# Altium PCB LEDBoard.PcbDoc
Units mm, origin at the board's own origin, x right, y up, seen from the top; angles counter-clockwise.
Board outline 21 x 160 mm, 2 copper layers (Top Layer, Bottom Layer), stack 0.57 mm thick; 16 components, 19 nets, 73 pads, 30 vias.
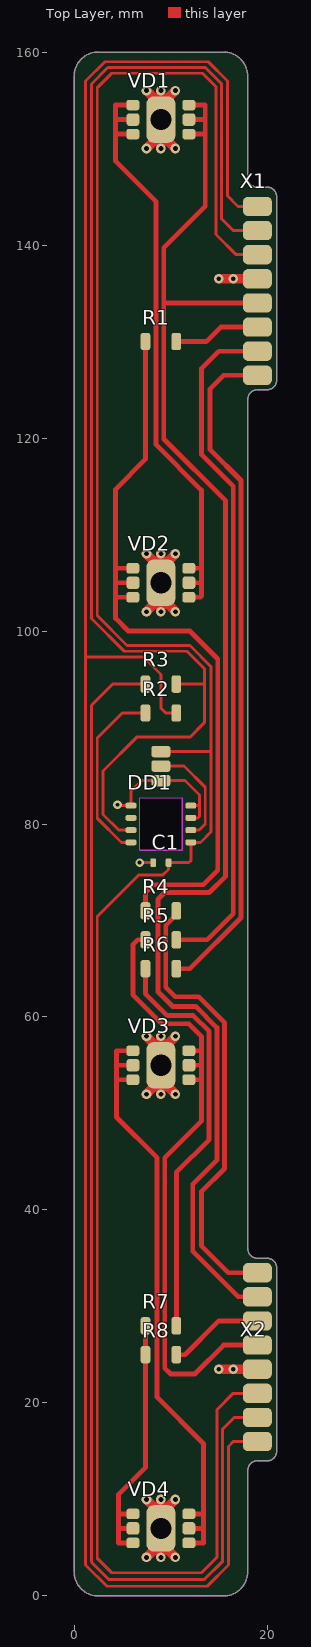
[diagram p0: Top Layer view]
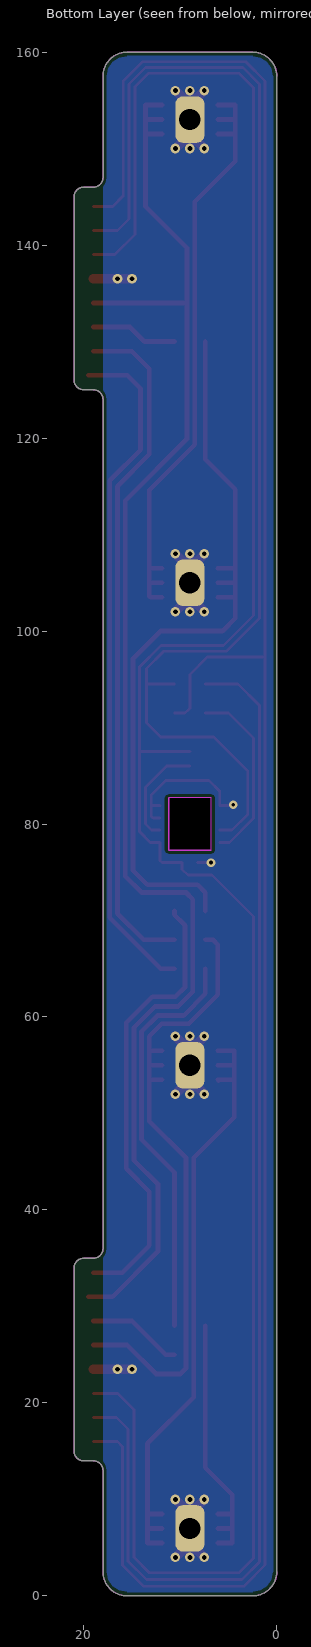
[diagram p1: Bottom Layer view, seen from below]
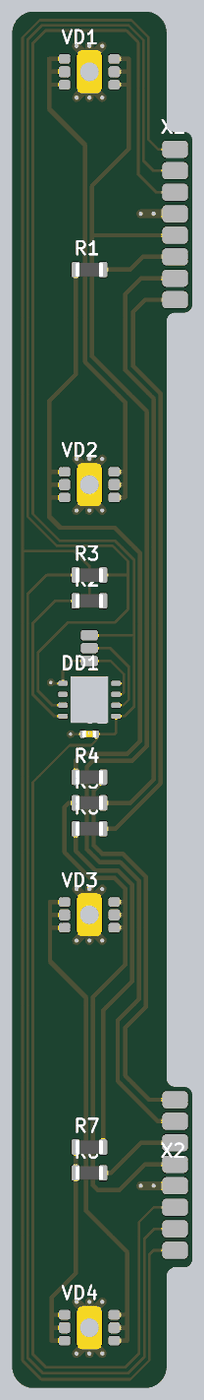
[diagram p2: 3D render of the assembled board from above, using the file's embedded part models]

## Layer stack, top to bottom
Top Solder: solder mask 0.0102, Solder Resist, Dk 3.5
Top Layer: signal copper 0.035
Dielectric 1: core 0.5, FR-4, Dk 4.2
Bottom Layer: signal copper 0.035

## Board outline
2.5,0 15.5,0 ccw(c15.5,2.5) 18,2.5 18,13 cw(c19,13) 19,14 20,14 ccw(c20,15) 21,15 21,34 ccw(c20,34) 20,35 19,35 cw(c19,36) 18,36 18,124 cw(c19,124) 19,125 20,125 ccw(c20,126) 21,126 21,145 ccw(c20,145) 20,146 19,146 cw(c19,147) 18,147 18,157.5 ccw(c15.5,157.5) 15.5,160 2.5,160 ccw(c2.5,157.5) 0,157.5 0,2.5 ccw(c2.5,2.5)

## Design rules (kind name [scope] priority, off if disabled: settings)
Clearance Clearance_Mid2_to_edge [OnLayer('Mid-Layer 2') vs OnLayer('Keep-Out Layer')] p1: gap=0.5
Clearance Clearance_Mid1_to_edge [OnLayer('Mid-Layer 1') vs OnLayer('Keep-Out Layer')] p2: gap=0.5
Clearance Clearance_Top_to_edge [OnLayer('Top Layer') vs OnLayer('Keep-Out Layer')] p3: gap=0.3
Clearance Clearance_Bottom_to_edge [OnLayer('Bottom Layer') vs OnLayer('Keep-Out Layer')] p4: gap=0.3
Clearance ClearancePoly [InPolygon] p5: gap=0.3
Clearance [All] p6: gap=0.3
FabricationTestPointUsage TestPointUsage [All] p1: valid=0 allowmultiple=FALSE
FabricationTestpoint Testpoint [All] p1: side=3 testpointundercomponent=TRUE minsize=1.016 maxsize=2.54 preferedsize=1.524 minholesize=0 maxholesize=1.016 preferedholesize=0.813 testpointgrid=0.025 allowsidetop=TRUE allowsidebottom=TRUE usegrid=TRUE gridtolerance=0
PolygonConnect [All] p1: connectstyle=Direct reliefconductorwidth=0.25 reliefentries=4 polygonreliefangle="45 Angle" airgapwidth=0.4
RoutingVias [All] p1: holewidth=0.4 width=0.9 viastyle="Through Hole" minholewidth=0.4 minwidth=0.9 maxholewidth=1 maxwidth=2
SilkToSolderMaskClearance SilkscreenOverComponentPads [IsPad] p1: minsilkscreentomaskgap=0.254 clearancetoexposedcopper=TRUE
SolderMaskExpansion [All] p1: expansion=0.102
Width [All] p1: maxlimit=3 minlimit=0.3 preferedwidth=0.5 minimp=50.000000 maximp=50.000000 favimp=50.000000
26 further rules are at their usual default settings.

## Components (designator, comment, footprint, x,y, rotation, side; value= is the part's Value field where it differs from the comment)
C1 "CC0603KRX7R7BB104" CAPACITORSMD0603(MANUAL) 9,76 r0 top
DD1 "LM75A" SO8_FLIPPED 9,80 r180 top
R1 "RC1206JR-070R" RESISTORSMD1206(MANUAL) 9,130 r0 top
R2 "RC1206JR-070R" RESISTORSMD1206(MANUAL) 9,91.5 r0 top (schematic designator R11)
R3 "RC1206JR-070R" RESISTORSMD1206(MANUAL) 9,94.5 r180 top (schematic designator R10)
R4 "RC1206JR-070R" RESISTORSMD1206(MANUAL) 9,71 r0 top (schematic designator R5)
R5 "RC1206JR-070R" RESISTORSMD1206(MANUAL) 9,68 r0 top (schematic designator R6)
R6 "RC1206JR-070R" RESISTORSMD1206(MANUAL) 9,65 r0 top (schematic designator R8)
R7 "RC1206JR-070R" RESISTORSMD1206(MANUAL) 9,28 r0 top
R8 "RC1206JR-070R" RESISTORSMD1206(MANUAL) 9,25 r0 top (schematic designator R4)
VD1 "OLP-5065F6L-06A" OLP-5065F6L-06A(MANUALVAR2) 9,153 r0 top
VD2 "OLP-5065F6L-06A" OLP-5065F6L-06A(MANUALVAR2) 9,105 r0 top
VD3 "OLP-5065F6L-06A" OLP-5065F6L-06A(MANUALVAR2) 9,55 r0 top
VD4 "OLP-5065F6L-06A" OLP-5065F6L-06A(MANUALVAR2) 9,7 r0 top
X1 "ConnectorLEDSide" CONNECTORLEDSIDE 19,144 r0 top
X2 "ConnectorLEDSide" CONNECTORLEDSIDE 19,16 r180 top

## Footprints (in the part's own frame and the unit in brackets; to place one, negate y for a bottom-side part, rotate by r counter-clockwise, add the part's x,y. Pads: shape width x height; smd on the part's side, far side on the other; paste and mask are expansions set on the pad)
CAPACITORSMD0603(MANUAL) [mm]
  rrect50% 0.6x0.9 smd: 1(-0.8,0) 2(0.8,0)
  body extent -0.8,-0.4 0.8,0.4, height 0.3
CONNECTORLEDSIDE [mm]
  rrect50% 3x2 smd: 1(0,0) 2(0,-2.5) 3(0,-5) 4(0,-7.5) 5(0,-10) 6(0,-12.5) 7(0,-15) 8(0,-17.5)
OLP-5065F6L-06A(MANUALVAR2) [mm]
  rrect50% 1.35x1.1 smd: 1(-2.9,-1.5) 1(-2.9,1.5) 2(2.9,-1.5) 2(2.9,1.5)
  rrect50% 1.35x1.3 smd: 1(-2.9,0) 2(2.9,0)
  rrect50% 3x4.8 hole 2.2: 3(0,0)
  body extent -3.2,-2.5 3.2,2.5, height 1.3
RESISTORSMD1206(MANUAL) [mm]
  rrect50% 1x1.8 smd: 1(-1.6,0) 2(1.6,0)
  body extent -1.6,-0.8 1.6,0.8, height 0.6
SO8_FLIPPED [mm]
  rrect50% 1.1x0.6 smd: 1(3.1,1.905) 2(3.1,0.635) 3(3.1,-0.635) 4(3.1,-1.905) 5(-3.1,-1.905) 6(-3.1,-0.635) 7(-3.1,0.635) 8(-3.1,1.905)
  Keep-Out Layer board cut-out: -2.2,2.7 2.2,2.7 2.2,-2.7 -2.2,-2.7
  Keep-Out Layer lines w0.1: 2.2,2.7 2.2,-2.7 -2.2,-2.7 -2.2,2.7 2.2,2.7
  body extent -2,-2.5 2,2.5, height 1.1

## Part data
C1: library part CapacitorSMD0603(reflow), "CAPACITOR Capacitor SMD 0603 1.6x0.8mm"
DD1: "IC Temperature sensor"
R1 R2 R3 R4 R5 R6 R7 R8: library part ResistorSMD1206, "RESISTOR Resistor SMD 1210 3.1x1.6mm"
VD1 VD2 VD3 VD4: "White LED 1.0W 155lm 3.0V 350mA"

## Free pads (board coordinates)
  rrect50% 2x1.2 smd: 0(9,84.5) 0(9,86) 0(9,87.5)

## Via types
v1: diameter 1, hole 0.5, Top Layer to Bottom Layer, tented top, 24 vias
v2: diameter 1, hole 0.5, Top Layer to Bottom Layer, tented both sides, 4 vias
v3: diameter 0.9, hole 0.4, Top Layer to Bottom Layer, tented both sides, 2 vias

## Nets (pads, with @x,y where several pads share a name; then routed paths per layer and width w, separated by ;. In a path a pad name is that pad's centre, name@x,y a point inside that pad or via, vN(x,y) a via of type N, cw(c..) or ccw(c..) an arc to the next point about the centre after c; other vN are vias at no path point)
A0: DD1.7 pad.0@9,86 | length 11.1
  Top Layer w0.3: pad.0@9,86 11.4,86 13.6,83.8 13.6,80 12.965,79.365 DD1.7
GND: C1.1 DD1.4 DD1.5 DD1.6 pad.0@9,84.5 VD1.3 VD2.3 VD3.3 VD4.3 X1.4 X2.4 | length 82.5
  Top Layer w0.3: v3(4.5,82) 4.595,81.905 DD1.4 5.9,83.4 7,84.5 9,84.5 11.5,84.5 13,83 13,81.9 ; v3(6.8,76) C1.1 ; DD1.6 12.835,80.635 13,80.8 13,81.9 ; DD1.5 12.105,81.9 13,81.9
  Top Layer w1: v1(7.5,4) VD4.3@9,5.5 ; v1(7.5,10) VD4.3@9,8.5 ; v1(7.5,52) VD3.3@9,53.5 ; v1(7.5,58) VD3.3@9,56.5 ; v1(7.5,102) VD2.3@9,103.5 ; v1(7.5,108) VD2.3@9,106.5 ; v1(7.5,150) VD1.3@9,151.5 ; v1(7.5,156) VD1.3@9,154.5 ; v1(9,4) VD4.3@9,5.5 ; v1(9,10) VD4.3@9,8.5 ; v1(9,52) VD3.3@9,53.5 ; v1(9,58) VD3.3@9,56.5 ; v1(9,102) VD2.3@9,103.5 ; v1(9,108) VD2.3@9,106.5 ; v1(9,150) VD1.3@9,151.5 ; v1(9,156) VD1.3@9,154.5 ; v1(10.5,4) VD4.3@9,5.5 ; v1(10.5,10) VD4.3@9,8.5 ; v1(10.5,52) VD3.3@9,53.5 ; v1(10.5,58) VD3.3@9,56.5 ; v1(10.5,102) VD2.3@9,103.5 ; v1(10.5,108) VD2.3@9,106.5 ; v1(10.5,150) VD1.3@9,151.5 ; v1(10.5,156) VD1.3@9,154.5 ; v2(15,23.5) v2(16.5,23.5) X2.4 ; v2(15,136.5) v2(16.5,136.5) X1.4 ; VD4.3@9,5.5 VD4.3 VD4.3@9,8.5 ; VD3.3@9,53.5 VD3.3 VD3.3@9,56.5 ; VD2.3@9,103.5 VD2.3 VD2.3@9,106.5 ; VD1.3@9,151.5 VD1.3 VD1.3@9,154.5
NetR6_1: R6.1 R7.2 | length 42.7
  Top Layer w0.5: R6.1 7.4,62.4 9.65,60.15 12.35,60.15 14,58.5 14,47.3 10.6,43.9 R7.2
SCL: DD1.2 R3.1 X1.2 | length 131.5
  Top Layer w0.3: DD1.2 4.635,79.365 3,81 3,85.5 6.5,89 12,89 13.5,90.5 13.5,94.5 ; R3.1 13.5,94.5 ; X1.2 16.5,141.5 15.3,142.7 15.3,156.7 13.6,158.4 3.5,158.4 1.8,156.7 1.8,101.3 5.2,97.9 11.7,97.9 13.5,96.1 13.5,94.5
SCL1: R3.2 X2.2 | length 128.2
  Top Layer w0.3: R3.2 4,94.5 1.8,92.3 1.8,3.5 3.6,1.7 13.5,1.7 15.4,3.6 15.4,17.3 16.6,18.5 X2.2
SDA: R2.2 X1.1 X2.1 | length 231.6
  Top Layer w0.3: 1.2,97.3 7.2,97.3 9,95.5 9,92 9.5,91.5 R2.2 ; X2.1 16.5,16 16,15.5 16,3.2 13.8,1 3.4,1 1.2,3.2 1.2,157 3.2,159 13.9,159 15.9,157 15.9,145.1 17,144 X1.1
SDA1: DD1.1 R2.1 | length 18.9
  Top Layer w0.3: DD1.1 4.905,78.095 2.4,80.6 2.4,88.9 5,91.5 R2.1
STR1: VD1.1 VD2.2 | length 63.8
  Top Layer w0.5: VD1.1@6.1,151.5 4.3,151.5 ; VD1.1@6.1,153 4.3,153 ; VD1.1@6.1,154.5 4.3,154.5 4.3,153 ; VD2.2@11.9,103.5 13.1,103.5 13.2,103.6 13.2,105 ; VD2.2@11.9,105 13.2,105 ; VD2.2@11.9,106.5 13.1,106.5 ; 4.3,151.5 4.3,153 ; 4.3,151.5 4.3,148.7 8.5,144.5 8.5,119.3 13.2,114.6 13.2,105
STR1+: VD1.2 X1.5 X2.7 | length 157.7
  Top Layer w0.5: VD1.2@11.9,151.5 13.6,151.5 ; VD1.2@11.9,153 13.6,153 ; VD1.2@11.9,154.5 13.6,154.5 13.6,153 ; X1.5 9.3,134 ; X2.7@19.5,31 17,31 12.3,35.7 12.3,42.675 14.8,45.175 14.8,58.9 12.6,61.1 10.2,61.1 8.7,62.6 8.7,72.2 9.4,72.9 14,72.9 15.7,74.6 15.7,113.5 9.3,119.9 9.3,134 ; 9.3,134 9.3,139.7 13.6,144 13.6,151.5 ; 13.6,151.5 13.6,153
STR1-: R1.1 R4.1 VD2.1 | length 79.9
  Top Layer w0.5: 4.4,103.5 VD2.1@6.1,103.5 ; VD2.1@6.1,105 4.3,105 ; VD2.1@6.1,106.5 4.3,106.5 ; R4.1 7.4,72.9 8.2,73.7 13.4,73.7 14.9,75.2 14.9,97.1 12,100 5.6,100 4.3,101.3 4.3,105 ; R1.1 7.4,117.8 4.3,114.7 4.3,106.5 ; 4.3,105 4.3,106.5
STR1-1: R1.2 X1.6 | length 9
  Top Layer w0.5: R1.2 13.7,130 15.2,131.5 X1.6
STR1-2: R4.2 X2.8 | length 47
  Top Layer w0.5: R4.2 10.6,70.6 9.5,69.5 9.5,63.1 10.5,62.1 12.9,62.1 15.6,59.4 15.6,44.3 13.2,41.9 13.2,36.3 16,33.5 X2.8
STR2: VD3.1 VD4.2 | length 64.3
  Top Layer w0.5: VD3.1@6,53.4 6.1,53.5 4.4,53.5 ; VD3.1@6.1,55 4.4,55 ; VD3.1@6.1,56.5 4.4,56.5 4.4,55 ; VD4.2@11.9,5.5 13.4,5.5 13.4,15.8 8.6,20.6 8.6,45.4 4.4,49.6 4.4,53.5 ; VD4.2@11.9,7 13.35,7 ; VD4.2@11.9,8.5 13.3,8.5 ; 4.4,53.5 4.4,55
STR2+: R5.1 VD3.2 X2.5 | length 66.5
  Top Layer w0.5: R5.1 6.6,68 6.1,67.5 6.1,62.3 9.1,59.3 11.9,59.3 13.2,58 13.2,55 ; VD3.2@11.9,53.5 13.2,53.5 ; VD3.2@11.9,55 13.2,55 ; VD3.2@11.9,56.5 13.1,56.5 ; X2.5 15.5,26 12.5,23 10,23 9.4,23.6 9.4,45.4 13.2,49.2 13.2,55
STR2+1: R5.2 X1.7 | length 71.4
  Top Layer w0.5: R5.2 13.8,68 16.5,70.7 16.5,115 13.2,118.3 13.2,127.2 15,129 X1.7
STR2-: R7.1 R8.1 VD4.1 | length 28.2
  Top Layer w0.5: VD4.1@6.1,5.5 4.6,5.5 4.6,7 ; VD4.1@6.1,7 4.6,7 ; VD4.1@6.1,8.5 4.6,8.5 ; R7.1 R8.1 7.4,13.3 4.6,10.5 4.6,8.5 ; 4.6,7 4.6,8.5
STR2-1: R6.2 X1.8 | length 71
  Top Layer w0.5: R6.2 12,65 17.3,70.3 17.3,115.6 14.1,118.8 14.1,125.1 15.5,126.5 X1.8@19.5,126.5
STR2-2: R8.2 X2.6 | length 9.8
  Top Layer w0.5: R8.2 11.5,25 15,28.5 X2.6
VCC: C1.2 DD1.8 pad.0@9,87.5 X1.3 X2.3 | length 242.3
  Top Layer w0.3: pad.0@9,87.5 14.2,87.5 ; X2.3 16.5,21 14.8,19.3 14.8,4 13.2,2.4 3.9,2.4 2.4,3.9 2.4,70.4 6.7,74.7 9.2,74.7 9.8,75.3 C1.2 11.9,76 12.1,76.2 DD1.8 13.095,78.095 14.2,79.2 14.2,96.3 12,98.5 5.5,98.5 2.4,101.6 2.4,156.3 3.9,157.8 13.3,157.8 14.7,156.4 14.7,141.1 16.8,139 X1.3
pads on no net: DD1.3

## Polygon pours and split planes (outlines as drawn)
GND on Bottom Layer "Signal Layer 1-No Net" (solid, pour order 2): 0,160 18,160 18,0 0,0

## Keep-outs
Keep-Out Layer:
  the board outline again, w0.1

## Text inside footprints (layer, text, board x,y; h text height)
X1: Mechanical 1 "8" at 18.5,126 h2; Mechanical 1 "7" at 18.5,128.5 h2; Mechanical 1 "6" at 18.5,131 h2; Mechanical 1 "5" at 18.5,133.5 h2; Mechanical 1 "1" at 18.5,143.5 h2; Mechanical 1 "2" at 18.5,141 h2; Mechanical 1 "3" at 18.5,138.5 h2; Mechanical 1 "4" at 18.5,136 h2
X2: Mechanical 1 "4" at 19.5,24 h2 r180; Mechanical 1 "3" at 19.5,21.5 h2 r180; Mechanical 1 "2" at 19.5,19 h2 r180; Mechanical 1 "1" at 19.5,16.5 h2 r180; Mechanical 1 "5" at 19.5,26.5 h2 r180; Mechanical 1 "6" at 19.5,29 h2 r180; Mechanical 1 "7" at 19.5,31.5 h2 r180; Mechanical 1 "8" at 19.5,34 h2 r180